# Altium PCB 400861.PcbDoc (part 4 of 7)
Units mm, origin at the board's own origin, x right, y up, seen from the top; angles counter-clockwise.
Board outline 145 x 63.5 mm, 8 copper layers (Top Side, Mid-Layer 1, Mid-Layer 2, Mid-Layer 3, Mid-Layer 4, Mid-Layer 5, Mid-Layer 6, Bottom Side), stack 1.529 mm thick; 287 components, 241 nets, 1164 pads, 3527 vias.
Unrouted connection lines stored in the file: 1.
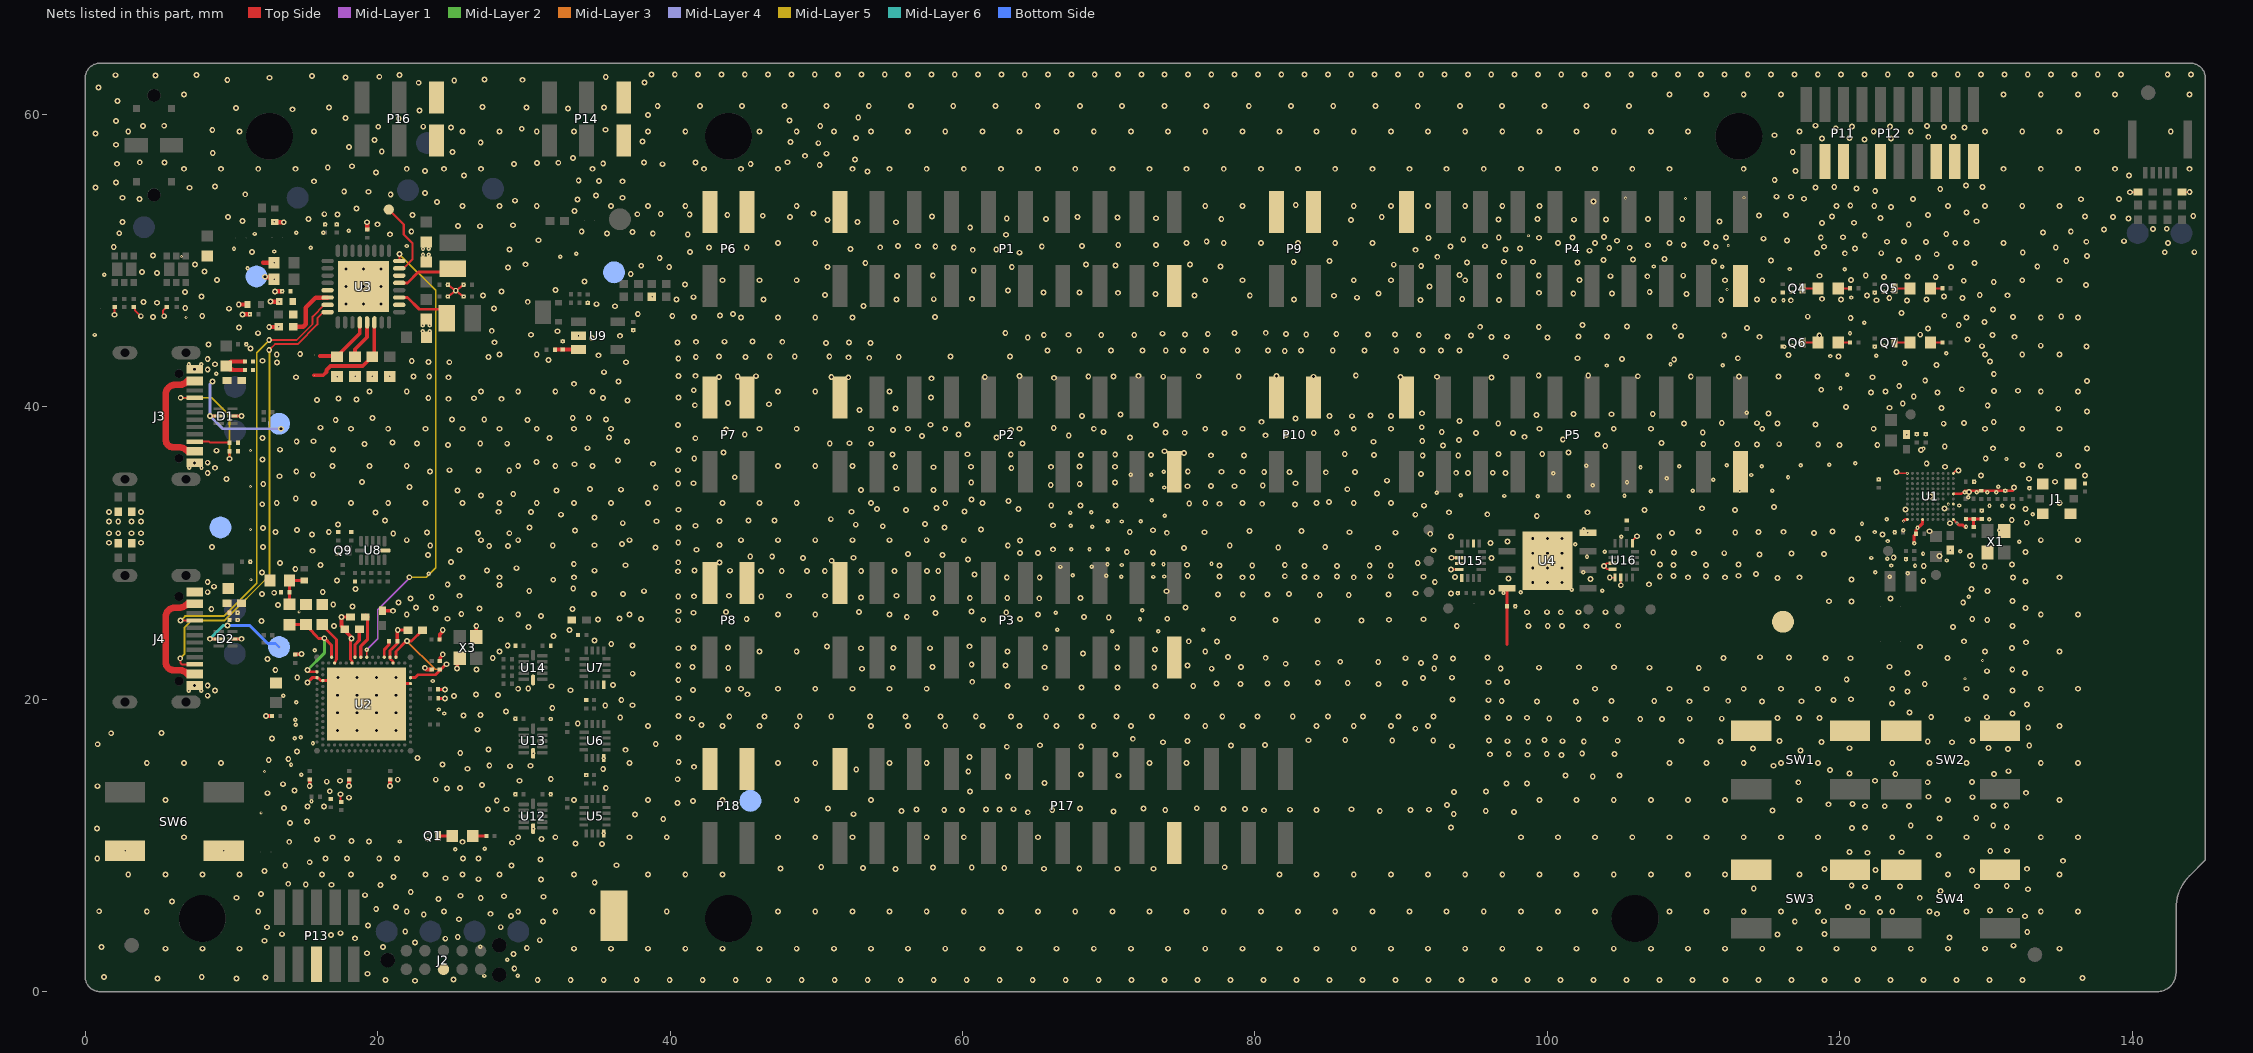
[diagram p9: the nets of this part, all layers, seen from the top]

## Via types
v1: diameter 0.4, hole 0.2, Top Side to Bottom Side, tented both sides, 2409 vias
v2: diameter 0.3, hole 0.1, Top Side to Mid-Layer 1, tented both sides, 307 vias
v3: diameter 0.3, hole 0.1, Mid-Layer 1 to Mid-Layer 2, tented both sides, 204 vias
v4: diameter 0.4, hole 0.2, Mid-Layer 3 to Mid-Layer 4, tented both sides, 199 vias
v5: diameter 0.3, hole 0.1, Mid-Layer 2 to Mid-Layer 3, tented both sides, 98 vias
v6: diameter 0.3, hole 0.1, Mid-Layer 4 to Mid-Layer 5, tented both sides, 82 vias
v7: diameter 0.3, hole 0.1, Mid-Layer 2 to Mid-Layer 3, 70 vias
v8: diameter 0.2, hole 0.1, Top Side to Mid-Layer 1, tented both sides, 64 vias
v9: diameter 0.2, hole 0.1, Mid-Layer 1 to Mid-Layer 2, tented both sides, 41 vias
v10: diameter 0.2, hole 0.1, Mid-Layer 2 to Mid-Layer 3, 17 vias
v11: diameter 0.2, hole 0.1, Mid-Layer 2 to Mid-Layer 3, tented both sides, 14 vias
v12: diameter 0.3, hole 0.1, Mid-Layer 5 to Mid-Layer 6, tented both sides, 12 vias
v13: diameter 0.2, hole 0.1, Mid-Layer 1 to Mid-Layer 2, 4 vias
v14: diameter 0.3, hole 0.1, Top Side to Mid-Layer 1, tented top, 3 vias
v15: diameter 0.2, hole 0.1, Top Side to Mid-Layer 1, tented top, 2 vias
v16: diameter 0.225, hole 0.1, Mid-Layer 1 to Mid-Layer 2, tented both sides, 1 vias

## Nets (pads, with @x,y where several pads share a name; then routed paths per layer and width w, separated by ;. In a path a pad name is that pad's centre, name@x,y a point inside that pad or via, vN(x,y) a via of type N, cw(c..) or ccw(c..) an arc to the next point about the centre after c; other vN are vias at no path point) (continued)
GND: C1.2 C2.2 C3.1 C4.1 C5.2 C6.1 C7.1 C10.1 C11.1 C12.2 C13.1 C14.1 C15.2 C16.2 C17.2 C18.2 C19.1 C20.2 C21.2 C22.2 C23.2 C24.2 C25.1 C26.2 C27.2 C28.2 C29.2 C30.2 C31.2 C32.1 C33.1 C34.1 C35.1 C36.1 C37.1 C38.1 C39.1 C40.1 C41.1 C42.1 C43.1 C44.1 C45.1 C46.1 C47.1 C48.1 C49.1 C50.1 C51.1 C52.1 C54.2 C55.1 C56.2 C57.1 C58.2 C59.2 C60.2 C61.2 C62.2 C63.1 C64.1 C65.1 C66.1 C67.2 C68.2 C69.1 C70.1 C71.1 C72.1 C73.2 C74.2 C76.1 C77.2 C78.2 C79.2 C80.2 C81.2 C82.2 C83.2 C84.2 C85.2 C86.2 C87.1 C88.1 C89.2 D1.2 D2.2 J1.2 J2.3 J3.A1 J3.A12 J4.A1 J4.A12 P1.2 P1.19 P2.2 P2.19 P3.2 P3.19 P4.2 P4.19 P5.2 P5.19 P6.2 P6.4 P7.2 P7.4 P8.2 P8.4 P9.2 P9.4 P10.2 P10.4 P11.3 P11.5 P11.9 P12.3 P12.5 P12.9 P12.15 P12.17 P12.19 P13.5 P14.3 P16.3 P17.2 P17.19 P18.2 P18.4 Q1.2 Q4.2 Q5.2 Q6.2 Q7.2 Q9.2 R2.1 R8.2 R9.2 R10.2 R17.2 R18.2 R20.2 R23.2 R24.2 R29.2 R30.2 R31.2 R32.2 R41.1 R45.1 R46.1 R51.2 R53.1 SW1.1 SW2.1 SW3.1 SW4.1 SW6.1 TP15.1 TP16.1 TP17.1 TP18.1 TP19.1 TP20.1 U1.A1 U1.A7 U1.A10 U1.D1 U1.D2 U1.E5 U1.E6 U1.F1 U1.F5 U1.F6 U1.K1 U1.K10 U2.104 U2.A25 U2.B12 U2.B26 U2.G1 U2.H2 U2.J31 U3.2 U3.6 U3.33 U4.4 U4.9 U5.8 U6.8 U7.8 U8.6 U9.2 U12.6 U13.6 U14.6 U15.6 U15.10 U15.11 U15.12 U15.13 U16.3 U16.4 U16.5 U16.6 U16.13 X1.2 X1.4 X3.2 X3.4 | length 45.8
  Top Side w0.1: v1(104.267,28.32) U16.5@104.623,28.32 ; U16.4@104.448,28.895 104.091,28.895 v1(103.881,29.105) 104.072,29.295 U16.3@104.448,29.295 ; v1(105.023,27.798) U16.6@105.023,28.32 ; U16.13@105.823,30.67 105.823,30.843 v1(106.128,31.147) ; v1(123.874,35.551) ccw(c124.118,35.795) 124.118,35.45 v8(124.62,35.45) ; C7.1@124.529,29.579 v2(124.529,29.583) ; U1.A1@127.77,32.3 v8(128.018,32.052) ; U1.K1@127.77,35.45 127.967,35.647 v1(128.131,35.647) ; v1(139.85,54.679) 140.378,54.679 C57.1@140.4,54.7 ; C56.2@143.4,54.7 143.41,54.69 v1(143.934,54.69)
  Top Side w0.15: v1(2,46.3) 2.01,46.31 2.01,46.811 R24.2@2.02,46.821 ; R23.2@3.32,46.821 3.38,46.761 3.395,46.761 3.395,46.606 v1(3.8,46.2) ; v1(5.4,46.2) 5.4,46.295 5.308,46.387 5.308,46.574 5.555,46.821 R20.2@5.57,46.821 ; v1(17.467,13.504) 17.467,13.018 R10.2@17.5,12.985 ; v2(24.797,47.547) 24.857,47.591 25.822,48.298 v2(25.882,48.342) ; v2(24.797,48.347) 24.857,48.303 25.818,47.592 v2(25.878,47.547) ; v1(93.415,28.883) U15.12@93.975,28.883 ; v1(93.449,29.677) 93.455,29.683 U15.10@93.975,29.683 ; v2(93.875,27.259) C62.2@93.883,27.266
  Top Side w0.152: U1.F1@127.77,34.05 128.32,34.05 128.53,34.261 C3.1@129.688,34.261 129.692,34.264 v2(131.32,34.264) 131.85,34.264
  Top Side w0.2: v1(15.2,21.15) 15.525,21.475 U2.G1@15.85,21.475 U2.G1@15.862,21.475 ; U2.G1@15.901,21.475 16.101,21.275 U2.H2@16.25,21.275 17.05,21.275 17.275,21.5 v1(17.3,21.5) ; v1(18.2,24.15) 18.136,24.086 18.136,22.72 18.25,22.606 U2.B12@18.25,22.475 ; U2.B26@21.05,22.475 21.05,22.575 20.85,22.775 U2.A25@20.85,22.875 20.85,23.325 20.925,23.4 20.925,23.403 21.354,23.832 C31.2@21.354,23.975 ; v1(21.25,21.475) 21.65,21.075 U2.J31@22.25,21.075
  Top Side w0.203: D2.2@10.065,24.134 v1(10.677,24.134) ; D1.2@10.065,39.37 v1(10.677,39.37) ; v1(17.525,25.625) 17.53,25.63 C25.1@18.148,25.63 C25.1@18.3,25.63 ; v1(21.375,24.725) C19.1@22.075,24.725 ; R8.2@24.135,20.675 v1(24.6,20.675) ; C22.2@24.143,20.067 24.151,20.059 24.592,20.059 v1(24.6,20.05) ; C5.2@123.761,31.414 v2(123.761,31.419) ; v8(124.372,32.189) 124.484,32.3 U1.A10@124.62,32.3 ; v2@125.093,30.677 v3(125.088,30.677) 125.088,31.191 C6.1@125.209,31.312 125.209,31.582 125.67,32.043 U1.A7@125.67,32.3 ; v8(128.018,32.052) 128.146,31.924 128.413,31.924 128.545,31.792 v2(128.636,31.792)
  Top Side w0.225: U2.104@17.85,21.075 U2.104@19.25,19.675 U2.104@19.545,19.675 ; C18.2@20.325,26.025 20.355,26.055 21.053,26.055 v1(21.058,26.05) ; v1(23.225,22.15) v1@23.335,22.04 ; C20.2@24.25,22.61 24.265,22.61 24.288,22.633 24.288,22.839 24.45,23.001 v1(24.45,23.075)
  Top Side w0.25: v1(12.372,18.85) cw(c12.402,18.602) 12.402,18.852 12.759,18.852 C15.2@12.769,18.854 ; C77.2@14.35,23.06 v1(14.8,23.1) ; C32.1@17.75,24.7 v1@18.175,24.275 ; C31.2@21.35,23.975 v1@21.35,24.725 ; v1@23.335,22.04 C23.2@23.7,22.04 ; C24.2@24.238,24.091 24.248,24.101 24.248,24.43 24.377,24.559 24.377,24.585 24.45,24.658 v1(24.45,24.725)
  Top Side w0.254: v1(15.351,14.075) C16.2@15.35,14.515 ; v1(17.525,25.625) 17.525,25.005 C32.1@17.75,24.78 ; v1(18.045,14.075) C17.2@18.046,14.515 ; v1(20.85,14.075) C21.2@20.85,14.515 ; v1(25.438,22.101) 25.438,22.642 X3.4@25.6,22.805 ; v1(26.746,25.009) 26.746,24.259 X3.2@26.75,24.255
  Top Side w0.3: v1(10.5,47) C34.1@11.087,47 ; v1(10.75,46.314) 10.762,46.325 C35.1@11.22,46.325 ; 12.157,49.869 12.167,49.86 12.916,49.86 v2(12.925,49.85) ; v1(12.3,48.9) 12.338,48.862 12.788,48.862 v2(12.925,48.725) ; v1(12.581,45.45) 12.594,45.463 13.219,45.463 v2(13.225,45.469) C39.1@13.231,45.475 ; v1(12.675,47.201) v2(13.263,47.201) ; v1(12.968,47.899) C37.1@13.428,47.899 ; C38.1@12.968,52.638 12.974,52.632 13.569,52.632 v1(13.575,52.625) ; C54.2@19.275,52.135 v1(19.275,52.625)
  other v1: 22.55,0.75 20.525,0.8 30.945,0.804 33.202,0.804 35.459,0.804 37.716,0.804 39.973,0.804 42.229,0.804 44.486,0.804 46.743,0.804 49,0.804 51.257,0.804 53.514,0.804 55.771,0.804 58.028,0.804 60.285,0.804 62.542,0.804 64.799,0.804 67.056,0.804 69.313,0.804 71.57,0.804 73.827,0.804 76.084,0.804 78.341,0.804 80.598,0.804 82.855,0.804 85.112,0.804 87.369,0.804 89.626,0.804 91.883,0.804 94.14,0.804 96.397,0.804 98.654,0.804 100.911,0.804 103.168,0.804 105.425,0.804 107.682,0.804 109.939,0.804 112.196,0.804 114.453,0.804 116.71,0.804 118.967,0.804 121.224,0.804 123.481,0.804 125.737,0.804 127.994,0.804 130.251,0.804 132.508,0.804 25.175,0.825 4.946,0.904 10.334,0.906 136.603,0.939 12.325,0.961 1.288,1.009 7.968,1.008 19.3,1.225 29.345,1.588 29.287,2.585 19.268,2.626 5.48,2.94 8.02,2.94 10.56,2.94 33.42,2.94 35.96,2.94 38.5,2.94 41.04,2.94 43.58,2.94 46.12,2.94 48.66,2.94 51.2,2.94 53.74,2.94 56.28,2.94 58.82,2.94 61.36,2.94 63.9,2.94 66.44,2.94 68.98,2.94 71.52,2.94 74.06,2.94 76.6,2.94 79.14,2.94 81.68,2.94 84.22,2.94 86.76,2.94 89.3,2.94 91.84,2.94 94.38,2.94 96.92,2.94 99.46,2.94 102,2.94 104.54,2.94 107.08,2.94 109.62,2.94 112.16,2.94 114.7,2.94 117.24,2.94 119.78,2.94 122.32,2.94 124.86,2.94 127.4,2.94 129.94,2.94 135.02,2.94 30.201,2.99 1.101,3.062 20.359,3.064 131.872,3.144 22.543,3.372 12.251,3.485 31.083,3.523 24.625,3.625 18.45,3.65 127.5,3.7 25.475,3.75 16.8,3.868 13.463,3.932 15.25,3.932 115.744,3.919 118.964,3.947 17.45,4 132.824,4.086 21.888,4.114 12.424,4.406 28.418,4.411 19.345,4.529 31.319,4.792 116.926,4.79 118.919,4.821 25.553,4.954 132.68,5.16 29.123,5.183 23.153,5.285 27.725,5.325 126.65,5.325 121.548,5.434 122.75,5.45 4.21,5.48 11.83,5.48 21.99,5.48 24.53,5.48 29.61,5.48 32.15,5.48 34.69,5.48 39.77,5.48 47.39,5.48 49.93,5.48 52.47,5.48 55.01,5.48 57.55,5.48 60.09,5.48 62.63,5.48 65.17,5.48 67.71,5.48 70.25,5.48 72.79,5.48 75.33,5.48 77.87,5.48 80.41,5.48 82.95,5.48 85.49,5.48 88.03,5.48 90.57,5.48 93.11,5.48 95.65,5.48 98.19,5.48 100.73,5.48 103.27,5.48 108.35,5.48 110.89,5.48 113.43,5.48 115.97,5.48 118.51,5.48 123.59,5.48 126.13,5.48 128.67,5.48 133.75,5.48 136.29,5.48 0.955,5.5 130.275,5.55 131.638,5.567 19.9,5.65 21.25,5.8 120.568,5.799 5.925,6.175 24.163,6.33 27.05,6.4 10.35,6.425 122.614,6.419 125.472,6.419 31.341,6.492 28.65,6.525 25.675,6.563 19.144,6.598 12.023,6.686 22.265,6.819 126.9,6.875 132.869,7.004 114.117,7.057 121.731,7.18 124.115,7.185 129.389,7.211 131.423,7.226 120.817,7.256 16.839,7.314 20.205,7.305 15.081,7.33 13.885,7.378 34.844,7.466 31.164,7.671 26.901,7.694 24.637,7.758 21.089,7.854 16.184,8.006 2.94,8.02 5.48,8.02 8.02,8.02 10.56,8.02 18.18,8.02 23.26,8.02 25.8,8.02 28.34,8.02 33.42,8.02 38.5,8.02 41.04,8.02 43.58,8.02 81.68,8.02 84.22,8.02 86.76,8.02 89.3,8.02 91.84,8.02 94.38,8.02 96.92,8.02 99.46,8.02 102,8.02 104.54,8.02 107.08,8.02 109.62,8.02 112.16,8.02 117.24,8.02 127.4,8.02 135.02,8.02 12.25,8.25 129.047,8.283 122.451,8.318 55.412,8.4 65.579,8.409 70.611,8.409 73.053,8.409 118.952,8.399 132.809,8.403 47.546,8.42 67.99,8.42 53.193,8.464 62.853,8.453 57.982,8.496 60.633,8.496 77.933,8.509 50.339,8.516 13.681,8.622 29.155,8.618 36.337,8.645 15.35,8.85 135.275,8.95 31.125,9.034 0.819,9.105 16.425,9.12 17.894,9.12 20.104,9.12 21.321,9.12 25.827,9.12 26.886,9.12 126.748,9.348 121.89,9.503 124.212,9.538 120.67,9.559 130.293,9.62 131.442,9.643 35.34,10.103 33.527,10.128 29.192,10.183 13.95,10.25 25.796,10.251 19.4,10.275 18.204,10.301 15.85,10.4 31.194,10.451 6.75,10.56 16.91,10.56 29.61,10.56 32.15,10.56 37.23,10.56 39.77,10.56 47.39,10.56 49.93,10.56 52.47,10.56 57.55,10.56 60.09,10.56 65.17,10.56 98.19,10.56 100.73,10.56 103.27,10.56 105.81,10.56 108.35,10.56 110.89,10.56 113.43,10.56 115.97,10.56 118.51,10.56 123.59,10.56 126.13,10.56 128.67,10.56 133.75,10.56 136.29,10.56 0.809,11.169 120.846,11.198 121.723,11.228 93.401,11.237 131.42,11.253 130.496,11.36 124.853,11.376 14.012,11.538 15.17,11.64 39.533,11.808 126.817,11.84 129.336,11.889 37.594,12.12 52.543,12.139 93.598,12.143 64.466,12.269 97.715,12.285 70.328,12.319 55.82,12.35 88.541,12.347 95.785,12.361 115.4,12.4 58.748,12.424 66.138,12.418 80.619,12.404 84.209,12.418 90.65,12.418 27.535,12.451 56.849,12.452 59.962,12.434 61.612,12.452 73.867,12.432 82.397,12.447 91.895,12.447 28.821,12.475 62.52,12.454 86.615,12.475 63.484,12.482 77.859,12.503 79.317,12.503 50.79,12.518 13.603,12.552 68.035,12.532 72.381,12.532 76.019,12.546 15.209,12.67 16.327,12.669 121.731,12.683 123.078,12.682 124.729,12.688 130.51,12.688 131.392,12.731 93.145,12.775 119.232,12.815 120.882,12.834 40.5,12.899 41.568,13.032 28.149,13.077 5.48,13.1 33.42,13.1 38.5,13.1 43.58,13.1 48.66,13.1 53.74,13.1 99.46,13.1 102,13.1 104.54,13.1 107.08,13.1 109.62,13.1 112.16,13.1 117.24,13.1 127.4,13.1 135.02,13.1 18.049,13.268 129.08,13.301 126.058,13.331 12.475,13.575 132.732,13.602 93.623,13.655 60.509,13.687 95.794,13.689 16.724,13.706 14.31,13.754 24.743,13.907 25.637,13.922 35.604,13.923 0.83,14.055 27.141,14.138 13.522,14.192 97.211,14.249 98.603,14.246 65.597,14.261 117.164,14.319 126.014,14.323 129.05,14.345 16.517,14.363 17.425,14.425 29.702,14.427 122.402,14.426 21.375,14.5 23.975,14.5 40.52,14.53 31.841,14.554 103.103,14.707 63.122,14.725 70.659,14.773 101.246,14.788 104.933,14.788 68.115,14.843 130.557,14.889 123.8,14.9 120.673,14.931 60.398,15.058 131.529,15.081 119.341,15.152 52.733,15.207 35.424,15.229 26.135,15.247 41.634,15.381 29.06,15.423 30.464,15.451 115.466,15.452 27.636,15.476 24.438,15.539 4.21,15.64 6.75,15.64 9.29,15.64 37.23,15.64 47.39,15.64 49.93,15.64 55.01,15.64 57.55,15.64 72.79,15.64 75.33,15.64 108.35,15.64 110.89,15.64 113.43,15.64 115.97,15.64 118.51,15.64 123.59,15.64 126.13,15.64 128.67,15.64 133.75,15.64 136.29,15.64 40.588,15.709 12.55,15.85 13.888,15.911 22.725,15.975 60.481,16.05 98.652,16.203 100.961,16.198 70.456,16.225 96.074,16.235 97.363,16.251 99.957,16.259 104.594,16.266 102.385,16.293 25.65,16.325 14.475,16.436 117.316,16.488 36.948,16.542 27.579,16.555 131.507,16.59 114.061,16.632 120.667,16.652 130.18,16.661 63.03,16.754 68.117,16.763 93.487,16.79 78.352,16.847 132.961,16.842 65.291,16.856 80.69,16.869 0.851,16.921 39.02,16.933 73.71,17.058 127.681,17.057 118.752,17.076 98.692,17.107 102.494,17.104 111.832,17.104 126.017,17.102 97.267,17.131 101.029,17.133 109.182,17.14 115.875,17.134 129.067,17.147 75.394,17.153 89.393,17.17 92.198,17.174 104.811,17.16 83.657,17.194 96.018,17.179 86.178,17.219 99.798,17.204 71.647,17.294 12.774,17.325 40.569,17.392 1.775,17.675 5.225,17.7 17.25,17.875 18.583,17.875 19.917,17.875 21.25,17.875 26.839,17.919 90.97,17.988 132.888,18.073 38.5,18.18 43.58,18.18 46.12,18.18 48.66,18.18 53.74,18.18 56.28,18.18 58.82,18.18 61.36,18.18 63.9,18.18 66.44,18.18 68.98,18.18 71.52,18.18 76.6,18.18 79.14,18.18 84.22,18.18 86.76,18.18 89.3,18.18 91.84,18.18 135.02,18.18 42.15,18.25 33.685,18.337 103.974,18.644 106.352,18.642 128.727,18.637 41.5,18.668 102.144,18.661 107.848,18.652 109.741,18.67 111.927,18.67 100.128,18.684 115.741,18.709 117.208,18.721 118.606,18.709 95.906,18.745 97.37,18.727 98.612,18.738 36.592,18.763 130.063,18.774 126.253,18.786 44.05,18.812 46.458,18.812 48.867,18.812 51.021,18.812 53.683,18.812 56.092,18.812 58.5,18.812 60.909,18.812 63.317,18.812 65.726,18.812 68.134,18.812 70.543,18.812 72.951,18.812 75.359,18.812 77.768,18.812 80.176,18.812 82.585,18.812 84.993,18.812 87.402,18.812 89.81,18.812 92.219,18.812 40.579,18.856 25.881,18.882 27.033,18.929 131.809,19.019 17.25,19.075 18.583,19.075 19.917,19.075 21.25,19.075 124.765,19.099 28.775,19.167 31.944,19.405 35.567,19.577 37.422,19.592 132.799,19.634 123.576,19.719 99.297,19.851 101.948,19.848 109.716,19.86 114.681,19.857 117.378,19.862 96.878,19.883 104.386,19.874 107.309,19.879 112.37,19.894 95.979,19.937 119.576,19.944 36.665,19.958 93.524,19.991 120.761,19.999 40.571,20.072 130.012,20.16 25.228,20.225 8.375,20.243 17.25,20.275 18.583,20.275 19.917,20.275 21.25,20.275 28.229,20.3 26.732,20.335 45.302,20.339 124.622,20.523 8.875,20.593 33.182,20.614 41.575,20.625 131.813,20.607 43.95,20.675 29.61,20.72 44.85,20.72 47.39,20.72 49.93,20.72 52.47,20.72 55.01,20.72 57.55,20.72 103.27,20.72 108.35,20.72 110.89,20.72 113.43,20.72 115.97,20.72 118.51,20.72 123.59,20.72 128.67,20.72 133.75,20.72 136.29,20.72 30.301,20.741 65.688,20.757 70.613,20.793 68.128,20.811 31.891,20.89 63.076,20.908 75.783,20.895 7.485,20.934 73.188,20.916 8.375,20.944 36.102,20.983 79.005,21.035 88.447,21.049 125.813,21.038 77.369,21.076 82.198,21.076 80.859,21.089 90.261,21.104 86.351,21.116 84.308,21.143 95.987,21.164 97.244,21.187 60.665,21.195 40.562,21.308 120.475,21.362 91.492,21.445 18.583,21.475 19.917,21.475 93.486,21.475 14.5,21.5 37.443,21.749 124.637,21.798 132.68,21.806 130.074,21.919 13,22 26.766,22.026 131.802,22.024 53.116,22.086 77.044,22.09 92.264,22.095 96.808,22.11 110.359,22.128 43.976,22.145 55.229,22.155 70.613,22.163 73.11,22.18 99.429,22.16 106.993,22.16 57.941,22.206 65.607,22.19 102.154,22.192 104.557,22.192 41.531,22.208 79.046,22.212 123.398,22.225 62.943,22.3 75.393,22.305 40.562,22.312 60.628,22.389 82.104,22.428 91.35,22.475 84.3,22.498 88.437,22.545 85.834,22.566 12.464,22.762 93.555,22.778 90.297,22.809 119.026,22.815 120.735,22.806 127.363,22.813 27.873,22.821 80.737,22.834 112.058,22.831 95.903,22.851 116.535,22.863 78.153,22.888 92.33,22.884 114.533,22.878 68.231,23.125 28.34,23.26 46.12,23.26 48.66,23.26 76.6,23.26 129.94,23.26 135.02,23.26 63.087,23.277 73.172,23.401 40.567,23.491 53.067,23.489 57.784,23.494 55.286,23.51 131.768,23.516 41.6,23.55 43.954,23.54 65.656,23.543 70.58,23.545 50.732,23.598 125.488,23.588 60.486,23.622 28.893,23.669 37.43,23.689 35.977,23.789 132.739,23.895 77.417,23.952 75.472,23.965 128.488,23.963 34.838,24.025 32.029,24.318 33.113,24.726 30.328,24.939 127.749,24.947 102.679,24.991 17.011,25.002 98.711,25.018 100.027,25.014 100.993,25.01 131.809,25.015 104.854,25.03 12.058,25.343 40.56,25.408 130.089,25.416 61.421,25.436 28.416,25.472 35.066,25.46 24.787,25.504 38.007,25.486 45.24,25.483 63.922,25.498 129.063,25.488 36.547,25.513 70.001,25.601 68.316,25.632 56.19,25.637 31.173,25.691 21.99,25.8 29.61,25.8 37.23,25.8 47.39,25.8 49.93,25.8 55.01,25.8 65.17,25.8 133.75,25.8 136.29,25.8 25.721,25.837 58.143,25.893 41.612,25.919 62.992,25.933 98.605,25.952 99.982,25.956 100.92,25.953 102.136,25.956 103.979,25.954 43.831,25.969 52.916,25.97 60.606,25.992 40.564,26.018 8.622,26.181 33.315,26.179 23.953,26.218 26.976,26.206 132.7,26.234 22.623,26.267 18.287,26.334 13.171,26.445 16.96,26.486 21.423,26.609 128.441,26.61 120.81,26.686 119.255,26.703 131.813,26.723 22.247,26.892 65.247,26.905 123.472,26.888 57.96,26.92 63.059,26.926 68.06,26.926 60.498,26.931 53.05,26.965 23.7,27 40.556,27.022 41.641,27.04 46.235,27.033 25.6,27.075 44.021,27.078 48.127,27.08 50.589,27.08 55.477,27.081 79.172,27.154 80.85,27.154 84.435,27.142 86.415,27.142 89.142,27.166 12.081,27.189 36.786,27.204 82.335,27.19 34.796,27.21 93.401,27.227 90.987,27.253 12.922,27.286 8.375,27.324 16.243,27.336 96.222,27.322 30.365,27.402 38.226,27.391 130.11,27.403 18.491,27.549 129.001,27.549 33.377,27.567 8.8,27.7 28.343,27.812 24.789,27.845 106.949,27.862 99.004,27.988 100.004,27.988 101.004,27.988 8.375,28.025 92.302,28.029 132.706,28.055 125.714,28.097 17.216,28.115 32.01,28.175 120.792,28.194 102.963,28.227 97.334,28.26 115.751,28.284 25.8,28.34 28.34,28.34 33.42,28.34 63.031,28.337 65.279,28.337 79.14,28.34 84.22,28.34 86.76,28.34 109.62,28.34 112.16,28.34 117.24,28.34 131.843,28.33 135.02,28.34 79.815,28.369 83.391,28.373 93.673,28.354 85.62,28.388 87.85,28.383 91.522,28.382 110.851,28.402 75.404,28.427 77.586,28.405 82.045,28.415 89.292,28.417 107.693,28.406 108.622,28.438 113.081,28.448 60.824,28.522 114.278,28.571 12.1,28.675 40.531,28.753 46.211,28.767 47.639,28.767 49.359,28.767 50.583,28.767 53.072,28.767 55.347,28.767 57.564,28.767 58.34,28.767 34.839,28.792 41.665,28.8 44.1,28.793 27.479,28.812 14.366,28.898 29.507,28.964 99.004,28.988 100.004,28.988 101.004,28.988 83.391,29.115 125.746,29.103 129.916,29.091 85.62,29.12 77.586,29.147 79.815,29.152 87.85,29.145 89.292,29.16 16.092,29.191 36.946,29.168 82.045,29.178 108.622,29.18 110.851,29.185 129.064,29.182 75.347,29.199 107.704,29.209 113.081,29.211 131.771,29.206 33.414,29.255 13.323,29.33 91.134,29.324 40.558,29.367 43.383,29.358 25.014,29.389 51.053,29.474 60.368,29.556 49.079,29.664 96.186,29.669 52.538,29.679 45.485,29.756 46.982,29.774 23.451,29.866 58.642,29.864 114.507,29.901 118.911,29.927 56.265,29.945 116.695,29.966 65.164,29.992 99.004,29.988 100.004,29.988 101.004,29.988 110.022,29.983 112.1,29.991 63.921,30.013 107.246,30.029 108.67,30.041 132.714,30.066 15.547,30.153 25.59,30.202 41.8,30.225 66.18,30.257 39.002,30.368 12.153,30.408 8.675,30.425 27.627,30.49 28.914,30.49 23.595,30.525 31.974,30.513 34.839,30.535 63.099,30.524 43.376,30.556 36.702,30.625 96.109,30.687 1.628,30.703 3.811,30.703 40.557,30.711 97.274,30.79 63.941,30.852 21.99,30.88 27.07,30.88 29.61,30.88 37.23,30.88 44.85,30.88 47.39,30.88 49.93,30.88 52.47,30.88 55.01,30.88 57.55,30.88 60.09,30.88 133.75,30.88 136.29,30.88 99.004,30.988 100.004,30.988 101.004,30.988 121.245,30.998 93.403,31.14 107.657,31.128 15.515,31.268 21.066,31.342 1.631,31.353 2.256,31.353 3.17,31.353 3.813,31.353 26.859,31.368 29.003,31.356 118.232,31.364 108.534,31.377 23.369,31.405 112.851,31.408 13.022,31.428 16.659,31.432 114.438,31.446 116.161,31.453 119.506,31.466 110.343,31.478 33.497,31.54 14.476,31.581 61.258,31.622 12.15,31.725 30.373,31.746 40.565,31.75 58.766,31.736 54.546,31.831 41.745,31.867 66.186,31.896 17.276,31.95 52.697,31.939 57.424,31.996 36.76,32.042 132.787,32.077 1.625,32.15 2.256,32.15 3.17,32.15 3.812,32.152 39.06,32.174 43.376,32.188 20.494,32.237 45.369,32.231 47.147,32.231 131.762,32.257 50.992,32.316 34.839,32.436 32.538,32.623 90.969,32.625 19.856,32.778 1.628,32.8 3.811,32.8 28.27,32.821 30.497,32.815 52.404,32.823 60.145,32.842 56.141,32.95 40.571,32.963 54.159,33.02 63.82,33.018 132.715,33.021 58.213,33.083 131.82,33.185 68.075,33.254 70.455,33.254 91.562,33.239 66.072,33.259 82.729,33.315 12.105,33.34 77.585,33.369 80.496,33.369 75.511,33.384 13.1,33.42 15.64,33.42 18.18,33.42 20.72,33.42 23.26,33.42 25.8,33.42 28.34,33.42 30.88,33.42 33.42,33.42 35.96,33.42 38.5,33.42 43.58,33.42 46.12,33.42 48.66,33.42 53.74,33.42 58.82,33.42 61.36,33.42 76.6,33.42 79.14,33.42 84.22,33.42 86.76,33.42 89.3,33.42 135.02,33.42 85.073,33.481 63.141,33.549 60.612,33.663 14.399,33.721 126.195,33.875 27.06,33.943 29.274,34.043 88.339,34.075 25.459,34.268 32.242,34.285 53.048,34.304 58.016,34.312 36.632,34.334 86.319,34.363 34.514,34.392 55.475,34.4 39.023,34.493 131.923,34.475 22.166,34.521 75.391,34.566 78.6,34.566 76.996,34.593 80.533,34.63 66.033,34.659 12.175,34.725 68.016,34.727 40.558,34.757 41.6,34.775 82.775,34.775 60.6,34.825 70.441,34.814 18.932,34.852 134.711,34.875 89.025,34.95 9.65,35.075 132.94,35.079 44.422,35.187 13.274,35.255 136.78,35.308 15.558,35.346 91.348,35.41 8.375,35.479 93.765,35.487 94.573,35.479 97.147,35.482 96.264,35.491 82.362,35.54 84.848,35.523 77.708,35.558 79.147,35.558 80.633,35.554 86.846,35.555 14.436,35.585 23.582,35.59 75.41,35.589 28.998,35.64 24.912,35.666 26.897,35.65 40.549,35.668 8.875,35.829 63.337,35.824 58.004,35.87 55.403,35.89 60.585,35.904 66.042,35.898 68.007,35.919 70.441,35.904 16.91,35.96 19.45,35.96 21.99,35.96 29.61,35.96 32.15,35.96 34.69,35.96 47.39,35.96 49.93,35.96 52.47,35.96 133.75,35.96 136.29,35.96 132.489,36.018 33.469,36.074 38.82,36.103 7.485,36.17 8.375,36.18 30.857,36.231 36.446,36.335 12.113,36.397 41.655,36.459 129.981,36.46 79.264,36.679 91.475,36.683 93.907,36.672 68.116,36.703 76.999,36.685 88.136,36.698 72.885,36.715 135.001,36.727 55.209,36.743 60.346,36.758 63.305,36.744 70.444,36.735 86.144,36.785 96.665,36.782 99.654,36.777 75.155,36.836 43.652,36.866 101.454,36.868 73.823,36.963 8.975,37 40.567,37.039 13.318,37.068 16.945,37.092 130.474,37.164 136.9,37.16 34.344,37.171 103.96,37.324 92.857,37.355 24.814,37.395 119.991,37.395 114.343,37.42 122.569,37.4 115.856,37.444 118.524,37.426 19.107,37.462 110.666,37.448 112.989,37.466 27.016,37.484 28.858,37.479 50.921,37.488 53.758,37.475 64.096,37.491 22.699,37.501 52.264,37.512 107.805,37.52 21.017,37.56 88.101,37.614 14.463,37.625 15.606,37.647 37.055,37.632 91.444,37.671 93.95,37.726 101.058,37.757 41.725,37.85 12.125,37.875 31.758,37.863 35.82,37.902 62.328,37.898 71.457,37.901 98.436,37.95 57.22,38.011 67.269,38.034 80.715,38.054 82.119,38.071 45.104,38.104 59.717,38.101 103.422,38.104 75.197,38.231 77.923,38.211 84.024,38.215 95.112,38.214 97.652,38.215 73.891,38.252 85.592,38.237 110.63,38.253 69.645,38.272 92.779,38.284 55.248,38.413 63.314,38.436 43.816,38.457 18.18,38.5 20.72,38.5 23.26,38.5 25.8,38.5 28.34,38.5 30.88,38.5 33.42,38.5 35.96,38.5 46.12,38.5 48.66,38.5 53.74,38.5 56.28,38.5 58.82,38.5 63.9,38.5 68.98,38.5 76.6,38.5 79.14,38.5 86.76,38.5 89.3,38.5 99.46,38.5 104.54,38.5 107.08,38.5 114.7,38.5 122.32,38.5 129.94,38.5 132.48,38.5 135.02,38.5 66.24,38.562 16.08,38.574 91.41,38.603 73.238,38.756 40.539,38.768 57.823,38.775 60.351,38.799 118.35,38.796 96.644,38.863 109.343,38.864 115.748,38.854 114.335,38.882 111.926,38.896 130.53,38.967 80.452,38.977 93.985,39.02 30.243,39.096 17.129,39.105 25.074,39.124 27.288,39.131 35.625,39.125 82.786,39.203 19.64,39.228 33.342,39.237 34.438,39.237 68.174,39.374 85.098,39.377 86.645,39.36 89.306,39.377 87.91,39.406 99.247,39.447 70.794,39.472 104.381,39.495 101.796,39.508 107.207,39.518 115.116,39.533 91.422,39.558 136.906,39.683 52.95,39.792 134.948,39.872 55.411,39.898 123.411,39.94 120.428,39.992 130.118,40.08 41.69,40.111 46.776,40.179 124.31,40.239 43.953,40.274 37.096,40.424 15.845,40.46 18.564,40.509 24.843,40.549 28.459,40.549 17.324,40.571 26.582,40.589 35.412,40.594 23.463,40.604 40.578,40.634 57.85,40.643 125.058,40.698 122.129,40.974 126.695,40.985 19.45,41.04 21.99,41.04 27.07,41.04 29.61,41.04 32.15,41.04 34.69,41.04 47.39,41.04 49.93,41.04 55.01,41.04 123.134,41.041 133.75,41.04 136.29,41.04 130.558,41.094 132.191,41.102 41.618,41.134 118.736,41.171 124.064,41.415 33.431,41.577 36.47,41.737 136.913,41.778 125.844,41.801 57.873,41.951 14.408,42.023 24.839,42.021 43.334,42.038 51.026,42.03 52.189,42.019 122.228,42.022 22.459,42.076 23.523,42.086 44.626,42.08 118.487,42.083 40.572,42.106 45.886,42.096 41.747,42.122 130.535,42.254 35.48,42.37 7.485,42.57 8.375,42.56 126.618,42.862 8.875,42.912 124.441,43.007 13.125,43.025 23.473,43.057 24.9,43.05 36.986,43.052 130.283,43.104 22.329,43.127 12.125,43.15 31.684,43.193 8.375,43.262 40.563,43.311 53.621,43.354 52.196,43.388 27.575,43.4 45.169,43.411 41.758,43.416 43.343,43.44 48.527,43.435 46.821,43.445 50.889,43.455 35.11,43.524 13.1,43.58 28.34,43.58 30.88,43.58 129.94,43.58 132.48,43.58 135.02,43.58 14.7,43.625 82.037,43.829 65.815,43.85 67.983,43.85 70.151,43.85 72.319,43.85 73.902,43.85 75.089,43.861 76.654,43.85 78.822,43.85 80.888,43.85 83.158,43.85 85.325,43.85 87.493,43.85 89.661,43.85 91.468,43.851 92.727,43.864 93.997,43.85 11.3,44 136.878,44.116 129.728,44.147 133.745,44.181 8.425,44.275 50.657,44.368 53.716,44.375 40.511,44.401 52.229,44.403 27.998,44.414 41.777,44.447 43.724,44.455 47.674,44.447 45.645,44.462 128.747,44.6 34.669,44.719 64.461,44.748 100.02,44.743 96.19,44.785 93.167,44.806 97.251,44.799 102.135,44.806 106.98,44.81 114.505,44.789 131.958,44.789 104.077,44.817 109.135,44.837 36.586,44.859 94.779,44.884 112.096,44.872 91.209,44.908 30.478,44.93 65.561,44.915 67.255,44.929 69.492,44.923 71.748,44.923 83.508,44.936 89.573,44.936 125.507,44.935 130.456,44.916 75.228,44.941 87.737,44.945 76.777,44.984 82.122,44.984 85.565,44.972 73.69,45.002 11.823,45.038 62.927,45.045 78.604,45.055 80.741,45.064 32.296,45.171 27.8,45.2 10.525,45.425 128.136,45.608 129.898,45.802 44.85,46.12 47.39,46.12 49.93,46.12 52.47,46.12 128.67,46.12 133.75,46.12 136.29,46.12 4.632,46.151 41.645,46.153 58.111,46.156 131.856,46.153 135.15,46.175 8,46.225 40.151,46.224 127.15,46.229 43.409,46.252 37.792,46.341 44.299,46.34 130.481,46.65 9.838,46.714 27.953,46.727 6.839,46.754 36.24,46.88 53.235,46.886 34.955,47.02 17.825,47.025 19.025,47.025 20.225,47.025 4.896,47.117 3.984,47.161 30.267,47.185 124.608,47.274 96.702,47.299 116.651,47.286 122.517,47.292 91.324,47.311 111.89,47.319 115.489,47.315 46.385,47.333 55.484,47.349 82.675,47.332 120.082,47.337 125.941,47.349 40.433,47.353 58.035,47.362 94.18,47.373 114.345,47.353 60.66,47.388 118.784,47.39 123.387,47.439 128.4,47.45 86.978,47.465 41.6,47.5 7.95,47.55 127.14,47.537 85.4,47.6 27.2,47.625 75.875,47.625 79.65,47.625 121.869,47.612 131.474,47.628 50.586,47.654 129.575,47.641 73.2,47.725 109.525,47.725 88.45,47.75 101.775,47.75 104.425,47.75 70.625,47.8 99.425,47.8 65.55,47.825 68,47.825 6.83,47.853 107,47.85 28.477,47.884 25.34,47.944 63.1,47.95 32.151,48.002 17.825,48.225 19.025,48.225 20.225,48.225 91.946,48.231 41.031,48.359 136.838,48.344 34.156,48.57 130.534,48.548 128.478,48.625 43.58,48.66 46.12,48.66 48.66,48.66 76.6,48.66 79.14,48.66 86.76,48.66 89.3,48.66 94.38,48.66 112.16,48.66 114.7,48.66 132.48,48.66 135.02,48.66 9.023,48.687 102.188,48.675 120.78,48.682 123.018,48.878 126.562,48.883 124.642,48.921 55.527,48.948 104.317,48.936 106.838,48.928 57.969,48.977 96.714,48.957 109.295,48.971 118.607,48.967 121.777,48.971 99.415,48.993 93.985,49.019 37.307,49.078 4.901,49.16 3.891,49.215 8.15,49.25 60.771,49.321 17.825,49.425 19.025,49.425 20.225,49.425 28.92,49.525 50.775,49.555 127.604,49.562 39.938,49.568 63.373,49.565 77.65,49.6 133.512,49.588 91.373,49.624 38.029,49.651 70.475,49.675 7.509,49.728 68.45,49.725 75.55,49.725 89.495,49.721 30.1,49.75 73.225,49.75 53.351,49.834 129.223,49.844 94.498,49.868 102.066,49.877 82.652,49.899 97.04,49.925 99.011,49.922 85.103,49.969 135.49,49.973 103.848,50.042 124.05,50.05 105.869,50.072 39.289,50.17 125.362,50.218 92.475,50.261 136.912,50.317 4.637,50.363 126.629,50.439 120.346,50.501 122.837,50.509 63.897,50.544 118.449,50.532 132.515,50.555 142.225,50.574 11.4,50.6 41.35,50.6 144.248,50.578 102.876,50.679 44.19,50.713 29.005,50.75 60.699,50.742 62.31,50.755 90.977,50.741 97.15,50.765 52.343,50.79 98.13,50.822 121.042,50.82 104.23,50.869 105.631,50.88 42.666,50.888 45.242,50.891 59.405,50.899 134.77,50.895 1.95,50.925 54.372,50.911 111.52,50.948 118.925,50.95 56.95,50.981 58.14,50.959 65.425,50.975 93.383,50.978 55.585,50.994 68.175,51 95.728,50.987 106.875,51.05 70.65,51.075 73.225,51.075 109.325,51.075 47.39,51.2 49.93,51.2 75.33,51.2 77.87,51.2 80.41,51.2 82.95,51.2 85.49,51.2 88.03,51.2 100.73,51.2 103.27,51.2 108.35,51.2 110.89,51.2 128.67,51.2 131.21,51.2 142.449,51.213 127.9,51.222 125.906,51.279 76.7,51.3 123.234,51.292 124.383,51.309 136.861,51.29 139.441,51.331 104.764,51.358 116.4,51.375 30.996,51.392 94.25,51.45 114.775,51.5 91.861,51.542 99.429,51.563 96.677,51.591 101.715,51.593 112.221,51.577 118.704,51.592 103.88,51.606 120.231,51.601 121.714,51.725 62.976,51.769 41.21,51.778 20.85,51.8 127.282,51.816 35.678,51.861 38.819,51.866 2.325,51.875 133.892,51.928 37.433,51.954 22.3,52 33.955,52.003 135.802,52.004 138.075,52.121 141.416,52.17 142.366,52.183 60.525,52.275 27.007,52.355 25.5,52.375 29.262,52.42 124.716,52.481 19.979,52.484 118.796,52.584 120.977,52.591 55.45,52.625 2.549,52.65 52.825,52.65 111.775,52.675 10.75,52.7 129.354,52.691 50.764,52.788 86.575,52.775 101.825,52.8 96.65,52.825 104,52.825 15.275,52.85 65.7,52.85 77.7,52.85 99.325,52.85 106.875,52.85 109.225,52.85 63.025,52.875 139.758,52.887 73.225,52.9 122.792,52.922 70.6,52.95 9.775,52.975 48.206,52.984 67.875,52.975 88.675,52.975 138.682,52.986 57.91,53.02 119.475,53.025 136.778,53.021 144.175,53.05 46.335,53.068 114.475,53.075 22.384,53.128 43.914,53.131 116.325,53.125 126.038,53.125 17.25,53.15 41.342,53.154 16.35,53.175 37.758,53.171 39.359,53.194 49.804,53.215 128.679,53.285 33.472,53.396 18.553,53.562 123.503,53.675 25.8,53.74 28.34,53.74 30.88,53.74 35.96,53.74 38.5,53.74 41.04,53.74 48.66,53.74 76.6,53.74 79.14,53.74 86.76,53.74 89.3,53.74 91.84,53.74 94.38,53.74 96.92,53.74 99.46,53.74 119.78,53.74 122.359,53.74 127.4,53.74 129.94,53.74 132.48,53.74 135.02,53.74 120.721,53.77 24.066,54.015 29.4,54.1 33.675,54.175 136.502,54.2 139.107,54.206 3.707,54.218 117.563,54.233 125.018,54.217 2.549,54.3 36.75,54.3 115.673,54.374 116.675,54.37 34.926,54.462 10.945,54.537 20.89,54.528 23.235,54.62 19.372,54.711 17.71,54.729 122.424,54.773 126.875,54.9 121.133,54.944 7.118,54.987 0.7,55 118.335,55.001 119.622,55.045 129.771,55.044 8.862,55.068 128.639,55.132 2.095,55.344 15.657,55.426 36.739,55.424 35.148,55.443 33.75,55.475 115.55,55.525 25.897,55.831 139.775,55.825 19.889,56.018 53.507,56.104 23.244,56.12 116.962,56.141 6.75,56.28 9.29,56.28 11.83,56.28 14.37,56.28 21.99,56.28 24.53,56.28 27.07,56.28 34.69,56.28 42.31,56.28 44.85,56.28 47.39,56.28 52.47,56.28 55.01,56.28 57.55,56.28 60.09,56.28 62.63,56.28 65.17,56.28 67.71,56.28 70.25,56.28 72.79,56.28 75.33,56.28 77.87,56.28 80.41,56.28 82.95,56.28 85.49,56.28 88.03,56.28 90.57,56.28 93.11,56.28 95.65,56.28 98.19,56.28 100.73,56.28 103.27,56.28 105.81,56.28 108.35,56.28 113.43,56.28 131.21,56.28 133.75,56.28 136.29,56.28 138.83,56.28 143.91,56.28 16.587,56.358 18.234,56.457 50.233,56.548 39.477,56.597 2.162,56.623 29.32,56.6 45.513,56.614 35.424,56.646 30.901,56.671 32.354,56.697 5.425,56.7 38.225,56.7 41.749,56.713 3.725,56.725 48.04,56.728 52.636,56.914 33.356,57.022 49.239,57.17 50.689,57.315 8.721,57.37 25.109,57.421 116.782,57.427 20.282,57.473 18.027,57.779 2.1,57.925 50.137,58.033 27.046,58.083 48.238,58.116 38.118,58.143 19.78,58.258 121.69,58.295 118.783,58.354 123.494,58.356 52.705,58.399 120.662,58.394 126.057,58.47 127.778,58.457 115.525,58.575 0.7,58.7 2.94,58.82 10.56,58.82 15.64,58.82 25.8,58.82 28.34,58.82 30.88,58.82 33.42,58.82 38.5,58.82 41.04,58.82 46.12,58.82 48.66,58.82 51.2,58.82 53.74,58.82 56.28,58.82 58.82,58.82 61.36,58.82 63.9,58.82 66.44,58.82 68.98,58.82 71.52,58.82 74.06,58.82 76.6,58.82 79.14,58.82 81.68,58.82 84.22,58.82 86.76,58.82 89.3,58.82 91.84,58.82 94.38,58.82 96.92,58.82 99.46,58.82 102,58.82 104.54,58.82 107.08,58.82 109.62,58.82 117.24,58.82 122.32,58.82 124.86,58.82 129.94,58.82 132.48,58.82 135.02,58.82 137.56,58.82 142.64,58.82 8.689,58.944 35.575,58.95 29.852,59.022 119.723,59.057 25.025,59.1 128.532,59.109 20.04,59.158 23.119,59.161 127.122,59.15 120.838,59.173 123.444,59.165 3.95,59.2 50.268,59.207 125.974,59.21 5.4,59.225 118.344,59.23 2.1,59.55 48.169,59.573 21.439,59.714 17.804,59.748 52.871,59.78 38.5,59.971 22.853,60.276 14.163,60.35 33.028,60.411 10.319,60.437 16.664,60.462 30.175,60.475 35.474,60.478 27.175,60.5 39.153,60.583 42.041,60.583 44.929,60.583 47.817,60.583 50.705,60.583 53.592,60.583 56.48,60.583 59.368,60.583 62.256,60.583 65.144,60.583 68.031,60.583 70.919,60.583 73.807,60.583 76.695,60.583 79.583,60.583 82.47,60.583 85.358,60.583 88.246,60.583 91.134,60.583 94.022,60.583 96.91,60.583 99.797,60.583 102.685,60.583 105.573,60.583 2.215,60.924 6.75,61.36 108.35,61.36 110.89,61.36 113.43,61.36 115.97,61.36 131.21,61.36 133.75,61.36 136.29,61.36 138.83,61.36 143.91,61.36 0.913,61.848 22.806,62.164 38.261,62.183 25.238,62.329 9.717,62.366 27.318,62.382 29.915,62.369 12.612,62.506 17.792,62.522 35.6,62.55 20.112,62.576 15.503,62.636 2.071,62.683 4.809,62.672 7.615,62.694 21.5,62.701 38.728,62.719 40.324,62.719 41.919,62.719 43.515,62.719 45.11,62.719 46.705,62.719 48.301,62.719 49.896,62.719 51.491,62.719 53.087,62.719 54.682,62.719 56.278,62.719 57.873,62.719 59.468,62.719 61.064,62.719 62.659,62.719 64.255,62.719 65.85,62.719 67.445,62.719 69.041,62.719 70.636,62.719 72.232,62.719 73.827,62.719 75.422,62.719 77.018,62.719 78.613,62.719 80.209,62.719 81.804,62.719 83.399,62.719 84.995,62.719 86.59,62.719 88.185,62.719 89.781,62.719 91.376,62.719 92.972,62.719 94.567,62.719 96.162,62.719 97.758,62.719 99.353,62.719 100.949,62.719 102.544,62.719 104.139,62.719 105.735,62.719 107.33,62.719 108.926,62.719 110.521,62.719 112.116,62.719 113.712,62.719 115.307,62.719 116.902,62.719 118.498,62.719 120.093,62.719 121.689,62.719 123.284,62.719 124.879,62.719 126.475,62.719 128.07,62.719 129.666,62.719 131.261,62.719 132.856,62.719 134.452,62.719 136.047,62.719 137.643,62.719 139.238,62.719 142.429,62.719 144.024,62.719
  other v2: 2.724,9.637 9.474,9.637 25.3,9.75 27.325,9.775 21.5,10.275 23.424,10.425 35.472,10.831 30.631,11.156 29.42,13.515 31.841,13.511 14.775,14.825 34.272,14.817 35.472,15.971 30.631,16.296 14.325,17.325 14.4,18.25 29.421,18.654 31.841,18.651 24.175,19.3 7.08,20.588 7.925,20.588 23.775,21.25 10.424,25.42 10.424,25.927 97.806,26.364 125.147,29.124 123.525,29.146 11.285,29.4 127.323,29.492 125.694,29.939 128.243,30.122 127.552,30.202 125.088,30.677 123.28,30.822 102.776,31.393 122.388,31.437 123.202,32.309 130.215,32.32 133.212,32.641 129.715,32.896 130.242,33.224 128.179,33.252 131.1,33.241 128.556,34.162 129.371,34.166 130.09,34.156 130.703,34.162 132.966,34.433 129.188,34.877 122.678,35.061 7.125,35.829 7.95,35.829 125.727,37.149 124.568,38.101 125.874,38.136 17.225,42.05 18.451,42.077 19.625,42.077 20.825,42.077 8.95,42.26 104.05,42.825 112,42.85 7.093,42.925 7.925,42.925 108.425,42.925 119.35,43.475 122.5,43.5 127.275,43.675 116.2,44.115 122.4,44.115 116.75,44.175 123.05,44.175 11.01,44.275 32.667,44.486 33.735,44.866 0.661,44.916 120.7,45.025 23.074,45.177 23.574,45.177 37.479,45.247 23.074,45.567 23.574,45.567 121.675,45.75 11.265,46.325 34.361,47.117 116.15,47.3 120.775,47.475 38.768,47.541 122.4,47.815 123.05,47.875 13.465,47.899 1.296,49.033 120.35,49.4 116.575,49.425 11.1,49.475 111.975,49.575 107.275,49.6 32.501,50.254 23.1,50.4 23.5,50.4 33.575,50.475 12.925,50.625 23.1,50.8 23.5,50.8 15.425,50.875 22,51 16.402,52.485 17.2,52.485 12.929,52.65
  other v3: 27.3,1.075 29.575,1.1 28.85,2.175 27.025,3.075 15.475,13.025 14.075,15.525 15.575,17 14.75,17.4 14.375,18.6 24.55,19.025 14.425,19.8 13.55,20.25 15.7,23.35 93.875,27.259 123.418,28.387 23.5,28.575 124.66,28.628 122.418,28.683 77.029,29.275 124.529,29.583 123.239,29.616 122.158,29.665 132.266,30.777 124.342,31.559 130.911,31.557 125.318,31.735 121.521,32.003 123.202,32.309 128.776,33.814 130.09,34.156 130.828,34.532 131.4,36.431 124.568,38.101 113.637,39.588 120.051,41.283 120.5,42.2 10.175,50.8 11.6,51.825 14.425,51.9 16.275,51.9 18.025,52.05
  other v4: 93.808,25.005 84.269,25.389 87.298,25.389 81.411,25.419 89.165,25.438 91.539,25.473 74.005,25.507 78.498,25.507 75.241,26.274 77.48,27.167 73.958,27.386 123.687,29.699 126.817,29.808 128.905,29.808 73.03,30.028 71.238,30.079 92.211,30.188 75.148,30.344 88.422,30.36 81.597,30.391 84.806,30.423 78.278,30.517 122.913,31.27 91.991,31.315 73.974,31.385 89.612,31.393 76.556,31.425 86.465,31.425 71.439,31.442 126.14,31.491 79.625,31.518 83.178,31.518 73.029,31.56 127.54,32.036 99.278,32.541 95.894,32.65 93.274,32.786 102.745,32.786 106.648,32.95 112.843,32.95 124.498,32.99 127.154,33.042 110.578,33.059 115.491,33.141 128.83,34.166 129.667,35.312 127.194,35.901 125.946,36.116 125.552,37.055 127.18,37.284 127.108,38.848 128.502,38.903 126.957,39.923 128.347,41.202 66.255,41.987 96.192,42.014 61.526,42.047 73.729,42.061 84.015,42.061 89.957,42.044 92.442,42.059 115.807,42.067 68.604,42.077 70.336,42.077 76.153,42.091 78.894,42.076 106.186,42.091 109.813,42.082 113.111,42.082 63.891,42.107 81.485,42.106 72.038,42.122 86.9,42.135 99.409,42.151 102.798,42.151 108.677,43.247 105.104,43.267 102.063,43.326 113.027,43.326 55.638,43.412 97.169,43.428 59.177,43.442 63.243,43.442 119.909,43.447 116.502,43.551 118.602,44.887 126.042,45.347 113.661,45.398 99.417,45.47 95.406,45.473 108.717,45.485 105.455,45.5 102.414,45.588 120.748,46.067 117.808,46.165 124.233,46.408 111.395,49.948 115.307,50.011 108.006,50.122 82.794,53.796 103.169,54.035
  other v7: 70.249,24.658 73.382,24.651 66.488,24.763 76.478,24.757 72.137,25.477 66.382,25.929 72.283,26.095 128.834,27.015 97.001,27.267 98.192,27.311 103.767,27.409 101.678,27.481 70.862,28.377 73.056,28.364 73.803,28.395 69.829,28.441 67.55,28.493 102.463,28.695 66.698,29.048 68.841,29.061 70.887,29.183 69.919,29.222 73.038,29.225 73.748,29.228 102.713,29.749 103.919,30.099 67.433,30.247 68.688,30.247 69.943,30.247 101.901,30.593 105.065,31.114 102.503,31.618 68.887,31.794 67.408,31.855 70.893,32.159 69.925,32.169 72.186,32.165 73.822,32.556 67.373,32.759 68.808,32.778 72.955,33.62 99.34,33.884 101.459,33.884 97.047,33.904 105.274,33.923 94.079,33.962 92.441,34.135 107.07,34.22 109.954,34.251 113.153,34.267 115.391,34.251 73.805,34.484 103.099,34.645 105.447,34.85 111.357,35.023 108.173,35.118 116.463,35.181 71.517,35.356 72.906,35.354 113.941,35.339 100.409,35.447 73.763,35.548 106.374,35.872 109.031,35.927 114.676,35.94 102.659,35.983 112.282,36.002 117.342,36.005 119.284,36.032 121.063,36.138
  other v8: 127.42,33.35
  other v10: 12.025,12.225 12.272,15.05 128.566,21.402 129.766,22.652 14.625,25.975 11.325,28.175 11.3,31.625 11.3,34.55 11.3,37 6.9,46.125 112.3,48.025 6.575,50.275 112.375,51.025 98.709,51.7 109.45,54.25 105.35,54.275 113.45,54.3
  other v14: 125.274,38.136
LDO1: C33.2 U3.29 | length 2.7
  Top Side w0.254: C33.2@18.451,43.4 18.451,43.94 19.275,44.764 U3.29@19.275,45.775
LDO1_CTRL: TP35.1 U3.7 | length 5.2
  Top Side w0.15: TP35.1@20.761,53.497 21.784,52.474 21.784,51.79 22.373,51.201 22.373,50.074 21.775,49.475 U3.7@21.475,49.475
LED_PWR_CTRL: U2.A17 U3.8 | length 31.8
  Top Side w0.125: U2.A17@19.25,22.875 v2(19.25,23.375) ; U3.8@21.475,49.975 21.5,50 21.482,50.018 v1(21.482,50.456)
  Mid-Layer 1 w0.125: v2(19.25,23.375) 20,24.125 20,26.127 22.163,28.289 v1(22.163,28.345)
  Mid-Layer 5 w0.125: v1(22.163,28.345) 23.336,28.345 23.971,28.98 23.971,30.357
  Mid-Layer 5 w0.127: v1(21.482,50.456) 21.482,50.451 23.971,47.963 23.971,30.357
NetC8_2: C8.2 C14.2 FB2.1 L5.1 | length 1.6
  Top Side w0.203: L5.1@128.636,32.317 128.645,32.326 C14.2@129.715,32.326 ; FB2.1@129.159,31.783 C8.2@129.159,32.326
NetC19_2: C19.2 C20.1 U2.A27 U2.G31 | length 9.2
  Top Side w0.2: U2.A27@21.25,22.875 21.25,23.268 v1@21.957,23.975 ; v1(22,23.975) 22.314,23.975 23.025,24.686 C19.2@23.025,24.725 ; U2.G31@22.25,21.475 22.55,21.475 22.75,21.675 23.925,21.675 ; 23.95,21.675 24.29,22.015 24.669,22.394 v1(24.701,22.394)
  Mid-Layer 3 w0.1: v1(22,23.975) 23.925,22.05 24.357,22.05 v1(24.701,22.394)
NetC25_2: C25.2 U2.A15 | length 3.1
  Top Side w0.225: U2.A15@18.85,22.875 18.85,23.612 19.3,24.062 C25.2@19.3,25.63
  Top Side w0.25: C25.2@19.177,25.753 C25.2@19.3,25.63
NetC27_1: C27.1 C28.1 FB5.1 R11.1 | length 2.6
  Top Side w0.203: R11.1@13.972,26.5 C27.1@13.972,28.121 13.974,28.124 FB5.1@14.982,28.124
NetC29_1: C29.1 R11.2 U2.A5 U2.E1 | length 7.7
  Top Side w0.158: v1(15.2,22) 15.325,21.875 U2.E1@15.85,21.875
  Top Side w0.2: R11.2@13.972,25.1 13.997,25.125 C29.1@15.1,25.125 ; C29.1@15.1,25.125 15.349,24.85 ccw(c15.546,24.887) 15.4,24.75 15.766,24.359 ccw(c15.912,24.496) 15.77,24.355 15.771,24.354 15.961,24.164 16.339,24.164 v1(16.35,24.175) 16.375,24.175 16.85,23.7 U2.A5@16.85,22.875
  Mid-Layer 2 w0.2: v1(15.2,22) 16.35,23.15 v1(16.35,24.175)
NetC30_1: C30.1 U2.B6 | length 2.9
  Top Side w0.187: C30.1@16.2,25.125 C30.1@16.389,24.844 ; C30.1@16.501,24.774 17.181,24.094 17.181,22.749 ; U2.B6@17.05,22.475 17.181,22.745
NetC31_1: C31.1 U2.A23 | length 1.2
  Top Side w0.2: U2.A23@20.45,22.875 20.45,23.387 20.784,23.721 C31.1@20.784,23.975
NetC32_2: C32.2 U2.A13 | length 2
  Top Side w0.225: U2.A13@18.45,22.875 18.45,23.72 18.75,24.02 C32.2@18.75,24.78
NetC36_2: C36.2 C37.2 R14.2 U3.21
NetC39_2: C39.2 U3.22 | length 4.1
  Top Side w0.305: C39.2@14.231,45.475 14.904,45.475 ; U3.22@16.575,47.475 15.77,47.475 15.082,46.788 15.082,45.654 ; 14.904,45.475 15.082,45.654 ; 14.904,45.475 15.082,45.654
NetC50_2: C50.2 SB29.2 SB30.2 U3.30 | length 7
  Top Side w0.254: 15.647,42.161 16.276,42.161 16.5,42.385 16.5,42.512 16.776,42.787 18.985,42.787 C50.2@19.625,43.427 19.775,43.577 U3.30@19.775,45.775
NetC51_2: C51.2 SB27.2 SB28.2 U3.28 | length 4.2
  Top Side w0.254: 16.044,43.477 17.175,43.477 17.178,43.474 C51.2@17.225,43.427 ; C51.2@17.225,43.461 18.775,45.011 U3.28@18.775,45.775
NetC58_1: C58.1 SB23.2 SB24.2 U4.8 | length 3.8
  Top Side w0.203: U4.8@97.234,27.583 97.234,23.745 SB24.2@97.241,23.738
NetC60_1: C60.1 R55.2 U9.3 | length 1.6
  Top Side w0.254: R55.2@32.117,43.916 U9.3@33.733,43.916
NetC64_2: C64.2 C65.2 C66.2 D1.5 FB3.1 J3.A4 J3.A9 TP21.1 | length 19
  Top Side w0.2: v1(8.527,39.37) D1.5@9.135,39.37
  Top Side w0.3: C66.2@10.915,42.52 10.06,42.52 10.009,42.572 9.86,42.572 FB3.1@9.635,42.797 9.66,42.797 9.963,43.1 C65.2@10.915,43.1
  Top Side w0.45: J3.A9@6.989,36.965 J3.A9@7.485,36.965 ; J3.A4@6.989,41.765 J3.A4@7.485,41.765 ; J3.A9@6.989,36.965 ccw(c6.415,36.475) 6.396,37.23 6.035,37.23 cw(c6.035,37.765) 5.5,37.765 5.5,40.865 cw(c6.135,40.865) 6.135,41.501 6.396,41.501 ccw(c6.415,42.255) J3.A4@6.989,41.765
  Mid-Layer 4 w0.2: v1@8.724,41.705 v1(8.7,41.729) 8.527,41.556 v1(8.527,39.37) 9.397,38.5 v1(13.4,38.5)
NetC70_2: C70.2 C71.2 C72.2 D2.5 FB4.1 J4.A4 J4.A9 TP24.1 | length 14.2
  Top Side w0.2: v1(8.527,24.134) D2.5@9.135,24.134
  Top Side w0.45: J4.A9@6.989,21.729 J4.A9@7.485,21.729 ; J4.A4@6.989,26.529 J4.A4@7.485,26.529 ; J4.A9@6.989,21.729 ccw(c6.415,21.239) 6.396,21.994 6.035,21.994 cw(c6.035,22.529) 5.5,22.529 5.5,25.629 cw(c6.135,25.629) 6.135,26.264 6.396,26.264 ccw(c6.415,27.019) J4.A4@6.989,26.529
  Mid-Layer 6 w0.2: v1(8.527,24.134) 9.439,25.046 v1(9.73,25.046)
  Bottom Side w0.2: v1(9.73,25.046) 11.255,25.046 12.48,23.82 13.01,23.82 TP24.1@13.259,23.572
NetJ3_A5: J3.A5 R46.2 | length 8.3
  Top Side w0.125: v1(6.527,40.62) J3.A5@7.485,40.62 J3.A5@7.487,40.62 ; R46.2@9.865,36.97 9.87,36.965 9.87,36.455 v1(9.875,36.45)
  Mid-Layer 5 w0.125: v1(6.527,40.62) 8.655,40.62 9.875,39.401 v1(9.875,36.45)
NetJ3_B5: J3.B5 R45.2 | length 2.4
  Top Side w0.125: J3.B5@7.485,37.62 7.49,37.625 8.475,37.625 8.55,37.55 R45.2@9.865,37.55
NetJ4_A5: J4.A5 U3.23 | length 29.5
  Top Side w0.125: v1(6.525,25.384) J4.A5@7.485,25.384 ; v1(12.581,44.564) 14.449,44.564 15.55,45.665 15.55,46.173 16.353,46.975 U3.23@16.575,46.975
  Mid-Layer 5 w0.125: v1(6.525,25.384) 6.833,25.692 9.483,25.692 11.725,27.935 11.725,43.708 v1(12.581,44.564)
NetJ4_B5: J4.B5 U3.24 | length 31.6
  Top Side w0.125: v1(6.5,22.8) 6.519,22.502 ccw(c6.644,22.511) 6.644,22.386 6.978,22.386 J4.B5@7.485,22.384 ; v1(12.581,43.898) 12.978,44.294 14.527,44.294 15.875,45.642 15.875,46.062 16.289,46.475 U3.24@16.575,46.475
  Mid-Layer 5 w0.125: v1(6.5,22.8) 6.797,23.098 6.797,24.921 7.256,25.38 9.517,25.38 12.6,28.463 12.6,43.879 v1(12.581,43.898)
NetL6_2: L6.2 U3.5 | length 5.1
  Top Side w0.2: U3.5@21.475,48.475 22.038,48.475 ; L6.2@25.125,49.44 24.902,49.217 22.78,49.217 ; 22.038,48.475 22.78,49.217 ; 22.038,48.475 22.78,49.217
NetL7_2: L7.2 U3.3 | length 3.9
  Top Side w0.2: U3.3@21.475,47.475 22.038,47.475 22.841,46.672 24.262,46.672 24.727,46.207 L7.2@24.727,46.047
NetLD1_1: LD1.1 Q4.3 | length 1.1
  Top Side w0.15: Q4.3@117.45,48.1 LD1.1@118.502,48.1
NetLD1_2: LD1.2 R25.1 | length 0.8
  Top Side w0.15: LD1.2@119.899,48.1 R25.1@120.715,48.1
NetLD2_1: LD2.1 Q5.3 | length 1.1
  Top Side w0.15: Q5.3@123.75,48.1 LD2.1@124.802,48.1
NetLD2_2: LD2.2 R26.1 | length 0.8
  Top Side w0.15: LD2.2@126.199,48.1 R26.1@127.015,48.1
NetLD3_1: LD3.1 Q6.3 | length 1.1
  Top Side w0.15: Q6.3@117.45,44.4 LD3.1@118.502,44.4
NetLD3_2: LD3.2 R27.1 | length 0.8
  Top Side w0.15: LD3.2@119.899,44.4 R27.1@120.715,44.4
NetLD4_1: LD4.1 Q7.3 | length 1.1
  Top Side w0.15: Q7.3@123.75,44.4 LD4.1@124.802,44.4
NetLD4_2: LD4.2 R28.1 | length 0.8
  Top Side w0.15: LD4.2@126.199,44.4 R28.1@127.015,44.4
NetLD5_1: LD5.1 Q1.3 | length 1
  Top Side w0.203: Q1.3@24.122,10.65 LD5.1@25.102,10.65
NetLD5_2: LD5.2 R5.1 | length 0.9
  Top Side w0.203: LD5.2@26.499,10.65 R5.1@27.433,10.65